# EAGLE board Sensor_board (EAGLE 7.7.0)
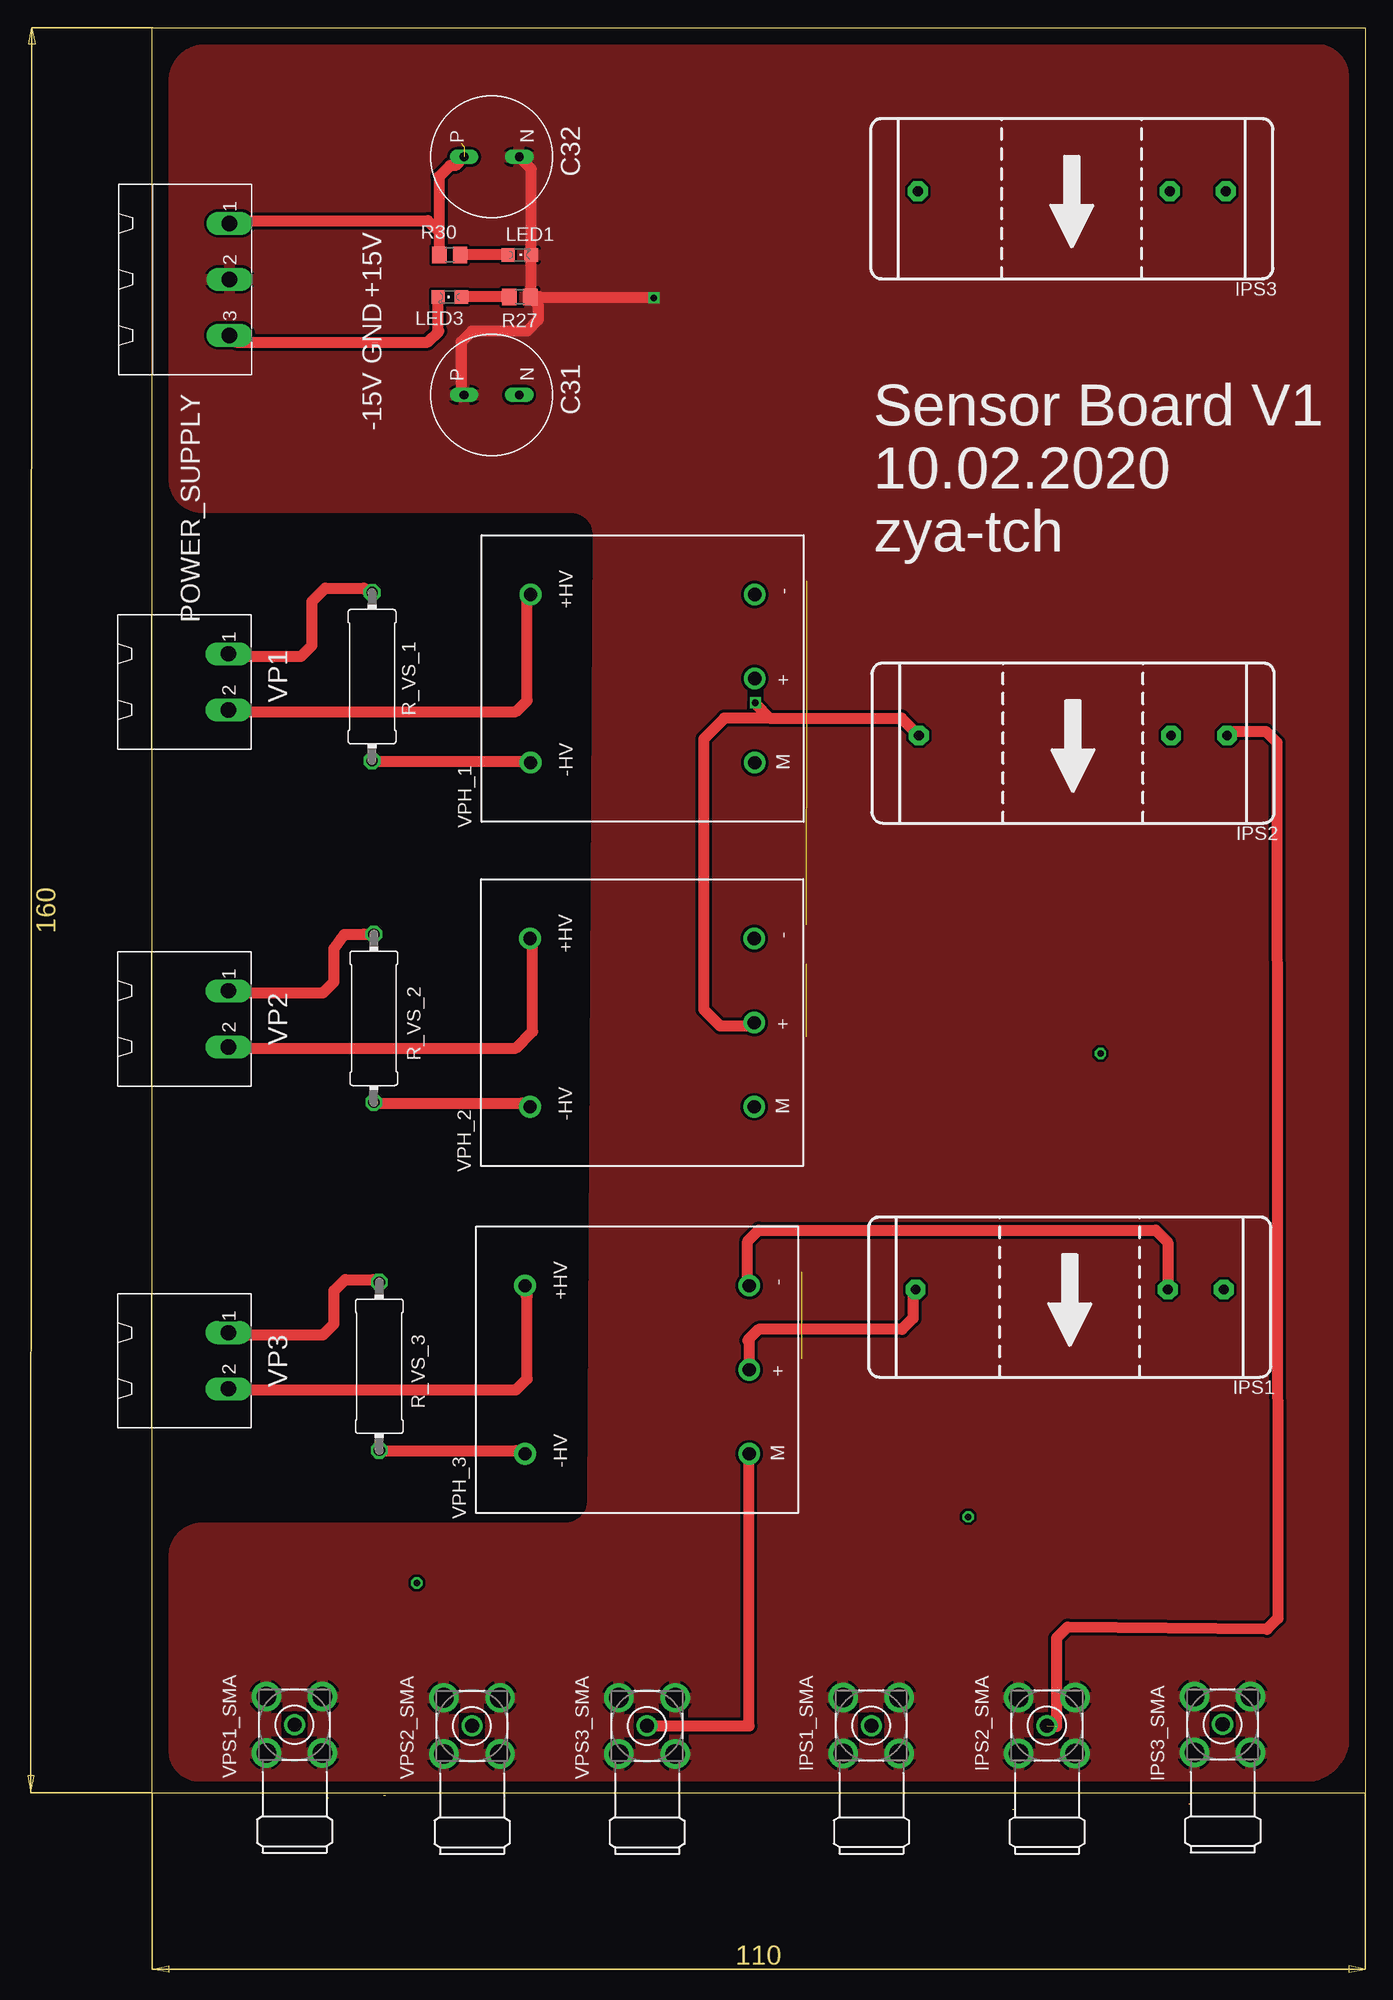
[diagram p0: board, top side]
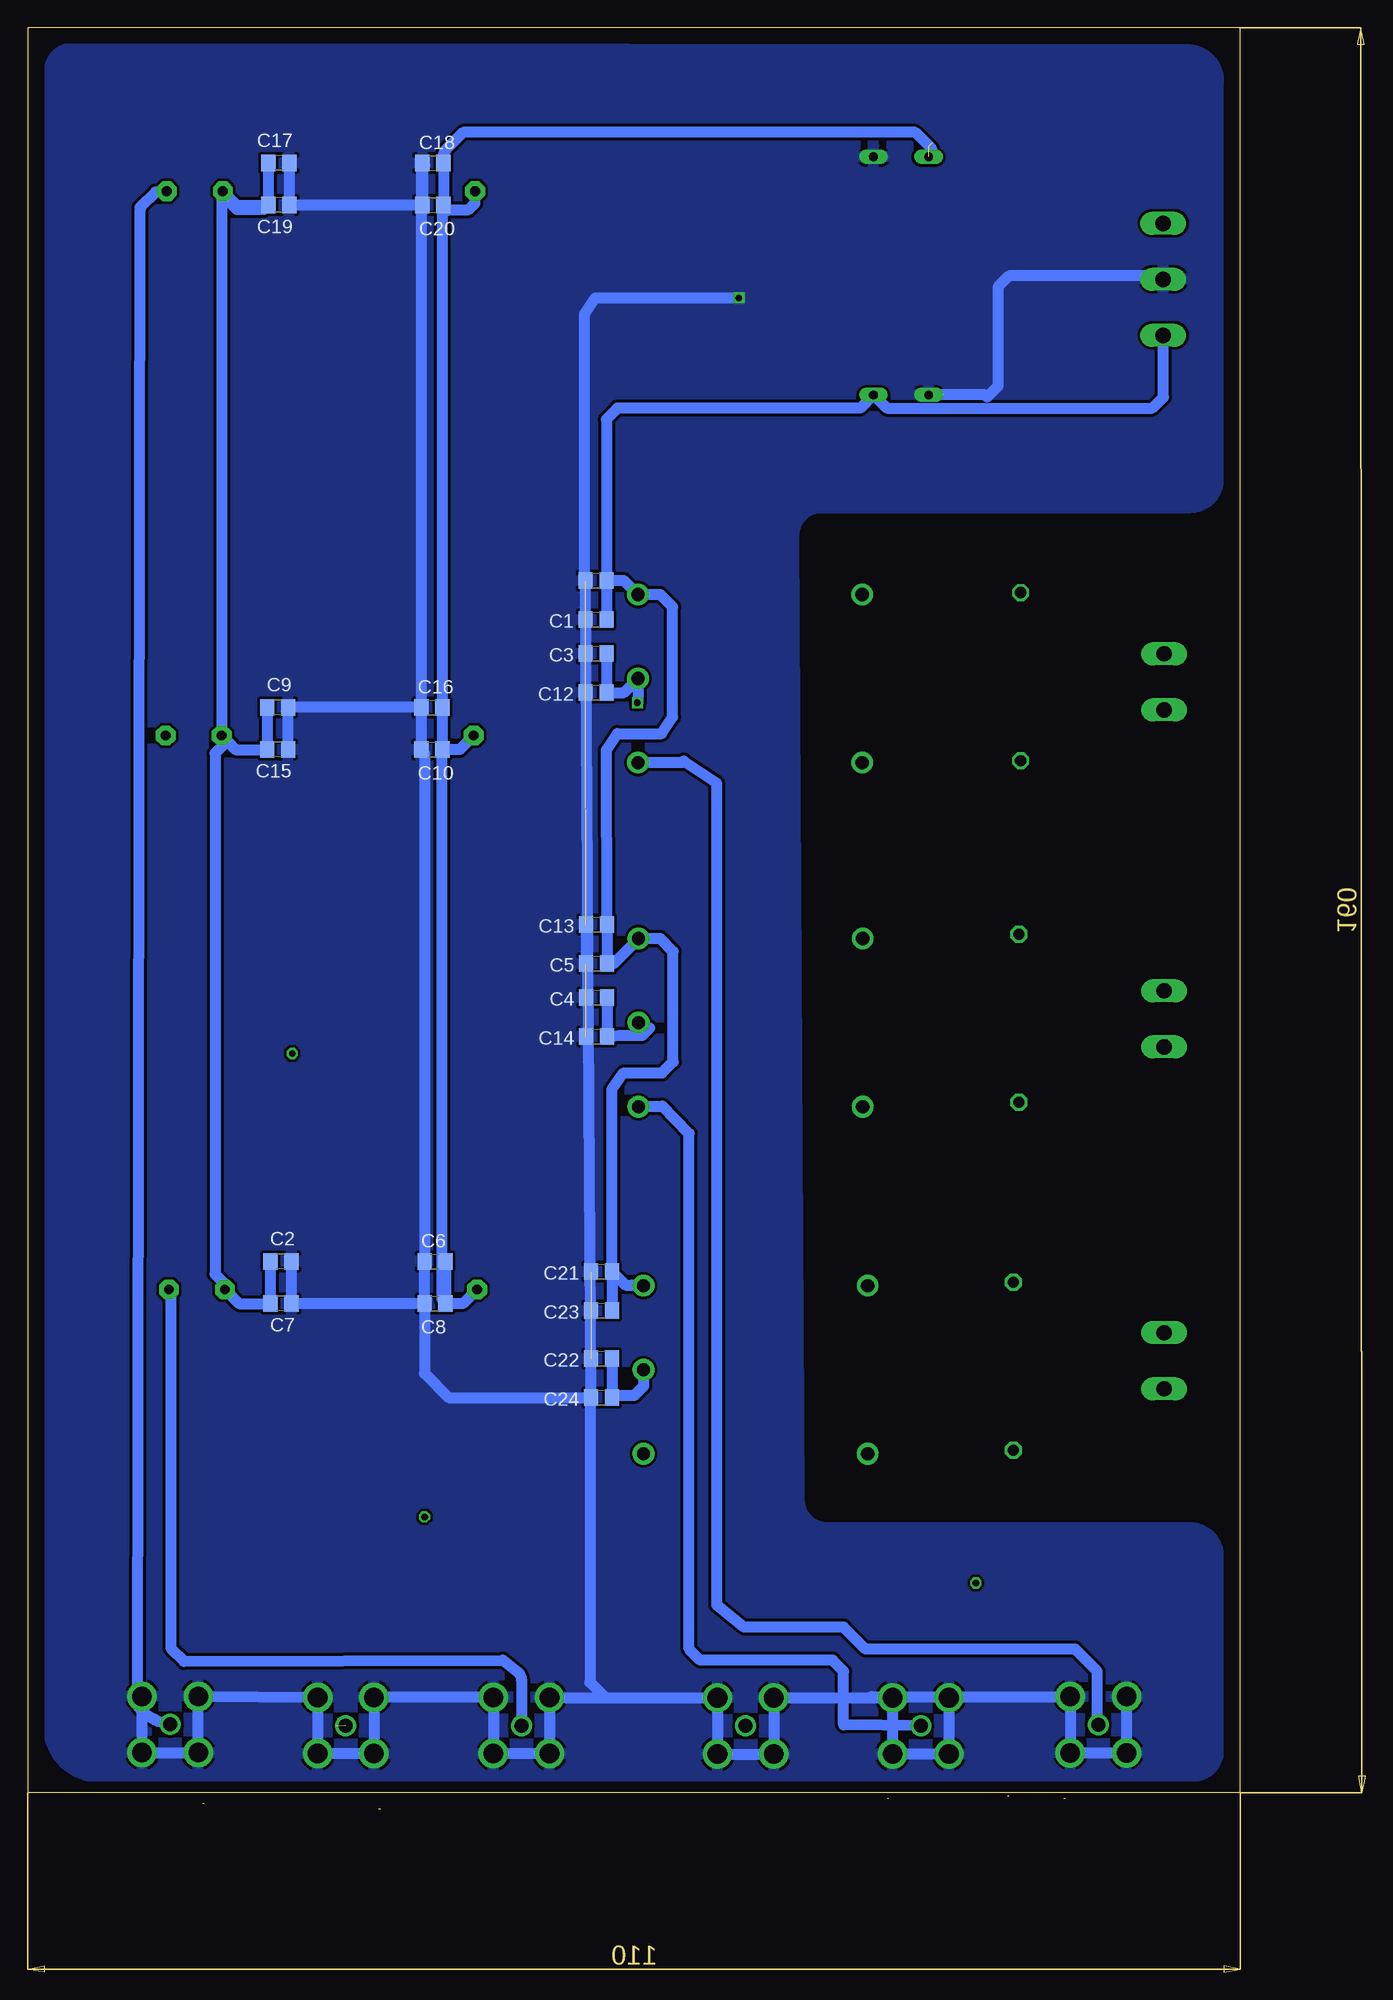
[diagram p1: board, bottom side, seen from below]

Size 110 x 161.5 mm. Coordinates in mm from the lower left corner, seen from the top.
Outline: 21.15,1.2 21,1.2
Outline: 16,1 15.9,1
Outline: 32,1 31.95,1
Outline: 94,0.5 94.1,0.5
Outline: 78,0 78.15,0
Outline: 0,1.5 110,1.5 110,161.5 0,161.5 0,1.5
Copper layers (1*16): Top 0.035mm / dielectric 1.5mm / Bottom 0.035mm
Design rules "default": minimum track width 10mil, minimum drill 24mil, track to track 8mil, track to pad 8mil, pad to pad 8mil, via to via 8mil, smd to smd 8mil, copper to edge 40mil, drill to drill 8mil, minimum pad ring 10mil, minimum via ring 8mil, stop-mask expansion 4mil, vias tented up to drill 0mil, thermal gap 10mil

## Footprints (pad centres in the part's own frame; a part is rotated, then mirrored left to right if it is on the bottom)
C0805 = smd 1.3 x 1.5: 1 -0.95,0; 2 0.95,0
ELEK_C_470UF_PAN = drill 0.8 long: + 0,2.5; - 0,-2.5
LA25P = drill 0.9 pad 1.8 octagon: M -13.97,0; V+ 13.97,0; V- -8.89,0
BU-SMA-H = drill 1.27: 1 0,0 | drill 1.778: 2 -2.55,2.55; 3 2.55,2.55; 4 2.55,-2.55; 5 -2.55,-2.55
CHIPLED_0805 = smd 1.2 x 1.2: A 0,-1.05; C 0,1.05
MSTBA3 = drill 1.397 long: 1 -5.08,5.08; 2 0,5.08; 3 5.08,5.08
R0805 = smd 1.3 x 1.5: 1 -0.95,0; 2 0.95,0
0414/15 = drill 1.016 octagon: 1 -7.62,0; 2 7.62,0
MSTBA2 = drill 1.397 long: 1 -2.54,5.08; 2 2.54,5.08
XDCR_LV25-P = drill 1.2 pad 1.962: 1 -7.62,10.16; 2 7.62,10.16; 3 -7.62,-10.16; 4 0,-10.16; 5 7.62,-10.16

## Placement (x,y rotation side)
C1  1u  [C0805]  58.45,107.84 0 bottom
C2  1u  [C0805]  87.02,49.65 180 bottom
C3  1u  [C0805]  58.45,104.76 0 bottom
C4  1u  [C0805]  58.4,73.57 0 bottom
C5  1u  [C0805]  58.4,76.65 0 bottom
C6  1u  [C0805]  73.05,49.65 0 bottom
C7  100n  [C0805]  87.02,45.84 180 bottom
C8  100n  [C0805]  73.05,45.84 0 bottom
C9  1u  [C0805]  87.32,99.87 180 bottom
C10  1u  [C0805]  73.35,96.06 0 bottom
C11  100n  [C0805]  58.45,111.38 0 bottom
C12  100n  [C0805]  58.45,101.22 0 bottom
C13  100n  [C0805]  58.4,80.19 0 bottom
C14  100n  [C0805]  58.4,70.03 0 bottom
C15  100n  [C0805]  87.32,96.06 180 bottom
C16  100n  [C0805]  73.35,99.87 0 bottom
C17  1u  [C0805]  87.21,149.22 180 bottom
C18  1u  [C0805]  73.24,149.22 0 bottom
C19  100n  [C0805]  87.21,145.41 180 bottom
C20  100n  [C0805]  73.24,145.41 0 bottom
C21  1u  [C0805]  57.95,48.73 0 bottom
C22  1u  [C0805]  57.95,40.84 0 bottom
C23  100n  [C0805]  57.95,45.19 0 bottom
C24  100n  [C0805]  57.95,37.3 0 bottom
C31  ELE_C_470UF_PAN  [ELEK_C_470UF_PAN]  30.79,128.2 90 top
C32  ELE_C_470UF_PAN  [ELEK_C_470UF_PAN]  30.79,149.79 90 top
IPS1  LA-25-P  [LA25P]  83.21,47.11 180 top
IPS1_SMA  BU-SMA-H  [BU-SMA-H]  65.21,7.58 270 top
IPS2  LA-25-P  [LA25P]  83.51,97.33 180 top
IPS2_SMA  BU-SMA-H  [BU-SMA-H]  81.14,7.58 270 top
IPS3  LA-25-P  [LA25P]  83.4,146.68 180 top
IPS3_SMA  BU-SMA-H  [BU-SMA-H]  97.07,7.68 270 top
LED1  [CHIPLED_0805]  33.33,140.9 270 top
LED3  [CHIPLED_0805]  26.98,137.09 90 top
POWER_SUPPLY  MSTBA3  [MSTBA3]  1.93,138.68 270 top
R27  2k  [R0805]  33.33,137.09 0 top
R30  2k  [R0805]  26.98,140.9 180 top
R_VS_1  21.1k  [0414/15]  19.94,102.67 270 top
R_VS_2  21.1k  [0414/15]  20.1,71.7 270 top
R_VS_3  21.1k  [0414/15]  20.6,40.15 270 top
VP1  MSTBA2  [MSTBA2]  1.85,102.2 270 top
VP2  MSTBA2  [MSTBA2]  1.85,71.65 270 top
VP3  MSTBA2  [MSTBA2]  1.85,40.65 270 top
VPH_1  LV_25-P  [XDCR_LV25-P]  44.48,102.49 90 top
VPH_2  LV_25-P  [XDCR_LV25-P]  44.43,71.3 90 top
VPH_3  LV_25-P  [XDCR_LV25-P]  43.98,39.84 90 top
VPS1_SMA  BU-SMA-H  [BU-SMA-H]  12.9,7.65 270 top
VPS2_SMA  BU-SMA-H  [BU-SMA-H]  29,7.55 270 top
VPS3_SMA  BU-SMA-H  [BU-SMA-H]  44.88,7.55 270 top

## Library data of the parts
C1-C24 R27 R30 R_VS_1-R_VS_3 = rcl
C31 C32 = Submodule
IPS1-IPS3 = lem
IPS1_SMA IPS2_SMA IPS3_SMA VPS1_SMA VPS2_SMA VPS3_SMA = con-coax; OC_FARNELL: unknown; OC_NEWARK: unknown
LED1 LED3 = led
POWER_SUPPLY = con-phoenix-508; MF: FARNELL; MPN: 1757255; OC_FARNELL: 3705183; OC_NEWARK: 71C4162
VP1-VP3 = con-phoenix-508; MF: FARNELL; MPN: 1757242; OC_FARNELL: 3705171; OC_NEWARK: 71C4161
VPH_1-VPH_3 = LV_25-P; DESCRIPTION: Current transformer [LEM] LV 25-P Current transformer; DIGI-KEY_PART_NUMBER: 398-1019-ND; DIGI-KEY_PURCHASE_URL: https://www.digikey.com/product-detail/en/lem-usa-inc/LV-25-P/398-1019-ND/409832?utm_source=snapeda&utm_medium=aggregator&utm_campaign=symbol; MF: LEM USA; MP: LV 25-P; PACKAGE: TSSOP-14 LEM

## Nets
+15V_TMA: C3.2 C4.2 C6.2 C8.2 C10.2 C12.2 C14.2 C16.2 C18.2 C20.2 C22.2 C24.2 C32.+ IPS1.V+ IPS2.V+ IPS3.V+ POWER_SUPPLY.1 R30.2 VPH_1.4 VPH_2.4 VPH_3.4
-15V_TMA: C1.2 C2.2 C5.2 C7.2 C9.2 C11.2 C13.2 C15.2 C17.2 C19.2 C21.2 C23.2 C31.- IPS1.V- IPS2.V- IPS3.V- LED3.C POWER_SUPPLY.3 VPH_1.5 VPH_2.5 VPH_3.5
GND_DIG: C1.1 C2.1 C3.1 C4.1 C5.1 C6.1 C7.1 C8.1 C9.1 C10.1 C11.1 C12.1 C13.1 C14.1 C15.1 C16.1 C17.1 C18.1 C19.1 C20.1 C21.1 C22.1 C23.1 C24.1 C31.+ C32.- IPS1_SMA.2 IPS1_SMA.3 IPS1_SMA.4 IPS1_SMA.5 IPS2_SMA.2 IPS2_SMA.3 IPS2_SMA.4 IPS2_SMA.5 IPS3_SMA.2 IPS3_SMA.3 IPS3_SMA.4 IPS3_SMA.5 LED1.C POWER_SUPPLY.2 R27.2 VPS1_SMA.2 VPS1_SMA.3 VPS1_SMA.4 VPS1_SMA.5 VPS2_SMA.2 VPS2_SMA.3 VPS2_SMA.4 VPS2_SMA.5 VPS3_SMA.2 VPS3_SMA.3 VPS3_SMA.4 VPS3_SMA.5
IPS1: IPS1.M IPS1_SMA.1
IPS2: IPS2.M IPS2_SMA.1
IPS3: IPS3.M IPS3_SMA.1
N$1: R_VS_1.2 VPH_1.1
N$2: R_VS_2.2 VPH_2.1
N$3: LED1.A R30.1
N$4: R_VS_3.2 VPH_3.1
N$12: LED3.A R27.1
VPA1: R_VS_1.1 VP1.1
VPA2: VP1.2 VPH_1.2
VPB1: R_VS_2.1 VP2.1
VPB2: VP2.2 VPH_2.2
VPC1: R_VS_3.1 VP3.1
VPC2: VP3.2 VPH_3.2
VPS1: VPH_1.3 VPS1_SMA.1
VPS2: VPH_2.3 VPS2_SMA.1
VPS3: VPH_3.3 VPS3_SMA.1

## Tracks (layer width: path | path; a pad name or v marks a point on that pad's centre or on a via)
+15V_TMA  (via drill 0.6)  (2 unrouted)
  Top 1.016: 26.03,143 26.03,147.97 26,148 27,149 27.5,149 C32.+ | 26.03,143 R30.2 | POWER_SUPPLY.1 7.25,144 25,144 26,143 26.03,143 | IPS1.V+ 69,46.87 69,44.5 68,43.5 55,43.5 54,42.5 54.14,42.36 VPH_3.4 | v54.7,100.3 54.7,100.2 56,98.9 | 56,98.9 67.97,98.9 IPS2.V+ | 56,98.9 51.9,98.9 50,97 50,72.5 51.5,71 54.29,71 VPH_2.4
  Bottom 1.016: C6.2 C8.2 | C10.2 C16.2 72.4,144.48 71.88,145 | C4.2 C14.2 56.33,70.15 54.25,70.15 53.59,70.81 VPH_2.4 | C22.2 C24.2 56.8,37.5 55,37.5 54.14,38.36 VPH_3.4 | C3.2 C12.2 55.91,101.22 VPH_1.4 54.64,100.36 v54.7,100.3 | 71.88,145 C20.2 C18.2 72.29,149.81 arc45 72,150.5 70.5,152 29.5,152 28,150.5 28,150.08 C32.+ | 71.88,145 70,145 69.43,145.57 IPS3.V+ | IPS2.V+ 70.81,96.06 C10.2 | C8.2 72.4,46.14 C10.2 | IPS1.V+ 70.51,45.84 C8.2
-15V_TMA  (via drill 0.6)
  Top 1.016: POWER_SUPPLY.3 7.61,133 25,133 26,134 25.93,134.07 LED3.C | v54,47.5 54,51.5 55,52.5 91,52.5 92.1,51.4 IPS1.V-
  Bottom 0.406: 57,48.5 56.8,48.5 55.9,47.6 55.3,47.6 55.2,47.5 54.18,47.5 VPH_3.5
  Bottom 1.016: C11.2 C1.2 | C2.2 C7.2 90.83,45.84 IPS1.V- 92.1,47.6 93,48.5 93,95.7 92,96.7 91.77,96.7 | C19.2 C17.2 | C21.2 57,48.5 C23.2 | C11.2 57.5,126 56.5,127 34.49,127 C31.- 32.09,127 8,127 7,128 7.01,128.01 POWER_SUPPLY.3 | C11.2 55.91,111.38 VPH_1.5 52.61,110.11 51.5,109 51.5,99 52.5,97.5 56.5,97.5 57.5,96 C13.2 C5.2 56.86,76.65 VPH_2.5 52.62,78.92 51.45,77.75 51.45,67.75 52.45,66.75 55.95,66.75 57,65.25 C21.2 | 91.77,96.7 IPS2.V- 92.4,146.6 92,147 92,146 91,145 88.56,145 C19.2 | IPS3.V- 91.02,145.41 C19.2 | C9.2 C15.2 91.13,96.06 91.77,96.7 | C21.2 55.77,47.5 55.2,47.5 v54,47.5
GND_DIG  (via drill 0.6)  (8 unrouted)
  Top 1.016: v45.5,137 35.3,137 35.21,137.09 R27.2 | R27.2 34.38,137.19 LED1.C 34.38,148.7 C32.- | R27.2 35,136.37 35,135 34,134 29,134 28,133 28,128 28.2,128.2 C31.+
  Bottom 1.016: C24.1 C22.1 | C2.1 C7.1 C8.1 | C17.1 C19.1 C20.1 74.19,148.78 | C8.1 C6.1 74,95.76 C10.1 C16.1 | C13.1 C5.1 | C16.1 C9.1 C15.1 | C24.1 59,37.3 59,11.5 57.6,10.1 VPS3_SMA.2 | VPS3_SMA.2 VPS3_SMA.3 VPS3_SMA.4 VPS3_SMA.5 VPS2_SMA.2 VPS2_SMA.3 VPS2_SMA.4 VPS2_SMA.5 33.45,10.2 VPS1_SMA.2 VPS1_SMA.3 VPS1_SMA.4 VPS1_SMA.5 | VPS3_SMA.2 61.13,10.1 IPS1_SMA.5 IPS1_SMA.4 IPS1_SMA.3 IPS1_SMA.2 IPS2_SMA.5 IPS2_SMA.4 IPS2_SMA.3 IPS2_SMA.2 IPS3_SMA.5 IPS3_SMA.4 IPS3_SMA.3 IPS3_SMA.2 | v45.5,137 58.5,137 59.5,135.5 59.5,111.48 C11.1 C24.1 | POWER_SUPPLY.2 7.33,139 21,139 22,138 22,129 23,128 23.2,128.2 C31.+ | C18.1 73.97,149 74.19,148.78 | C8.1 74,39.5 71.8,37.3 C24.1 | 74.19,148.78 74.3,148.67 C16.1
  pour Bottom (isolate 0.254): 108,157.46 108,6.52 arc-90 102.48,3 4.56,3 arc-90 2,5.06 2,22.96 arc-90 4.54,25.5 37.46,25.5 arc90 40,28.04 40.5,115.46 arc90 37.96,118 4.54,118 arc-90 2,120.54 2,156.5 arc-90 4.64,159.5 106.16,159.6 arc-90
  pour Top (isolate 0.254): 108,156.66 108,5.72 arc-90 103.48,3 4.56,3 arc-90 2,5.06 2,22.96 arc-90 4.54,25.5 37.46,25.5 arc90 40,28.04 40.5,115.46 arc90 37.96,118 4.54,118 arc-90 2,120.54 2,156.5 arc-90 4.64,159.5 105.96,159.5 arc-90
IPS1
  Bottom 1.016: IPS1.M arc45 97,46.67 97,14.6 95.8,13.4 66.9,13.5 65.5,12.4 arc45 65.21,11.7 IPS1_SMA.1
IPS2  (1 unrouted)
  Top 1.016: IPS2.M arc-45 98.37,97.7 101,97.7 102,96.7 102.1,17.3 101.1,16.3 83,16.5 82,15.5 82,7.5
IPS3
  Bottom 1.016: IPS3_SMA.1 arc45 100,9.34 99.8,144.9 99.8,145.2 98.4,146.6 97.44,146.6 IPS3.M
N$1
  Top 1.016: R_VS_1.2 19.99,95 34,95 34.13,94.87 VPH_1.1
N$2
  Top 1.016: R_VS_2.2 20.18,64 33.5,64 33.82,63.68 VPH_2.1
N$3
  Top 1.016: LED1.A R30.1
N$4
  Top 1.016: R_VS_3.2 20.63,32.5 33,32.5 33.28,32.22 VPH_3.1
N$8  (via drill 0.6)
  other vias: 86,68.5
N$10  (via drill 0.6)
  other vias: 74,26.5
N$12
  Top 1.016: R27.1 LED3.A
N$15  (via drill 0.6)
  other vias: 24,20.5
VPA1
  Top 1.016: VP1.1 7.17,104.5 13.5,104.5 14.5,105.5 14.5,109.5 15.7,110.7 19.2,110.7 19.61,110.29 R_VS_1.1
VPA2
  Top 1.016: VP1.2 7.09,99.5 33,99.5 34,100.5 34,109.5 34.32,109.82 VPH_1.2
VPB1
  Top 1.016: VP2.1 7.12,74 15.5,74 16.5,75 16.5,78 17.45,79.3 18.95,79.3 19.18,79.32 R_VS_2.1
VPB2
  Top 1.016: VP2.2 7.04,69 33,69 34.5,70.5 34.5,78.5 34.27,78.73 VPH_2.2
VPC1
  Top 1.016: VP3.1 7.12,43 15.5,43 16.5,44 16.5,47 17.5,48 20,48 20.23,47.77 R_VS_3.1
VPC2
  Top 1.016: VP3.2 7.04,38 33,38 34,39 34,46.5 33.82,46.68 VPH_3.2
VPS1
  Bottom 1.016: VPS1_SMA.1 13,7.8 13,12.5 15,14.5 34,14.5 36,16.5 45.01,16.5 47.5,18.5 47.5,93 50.5,95 50.63,94.87 VPH_1.3
VPS2
  Bottom 1.016: VPS2_SMA.1 36,7.65 36,12.5 37,13.5 49,13.5 50,14.5 50,61.25 52.45,63.75 52.52,63.68 VPH_2.3
VPS3
  Top 1.016: VPS3_SMA.1 54.14,7.55 VPH_3.3

## Text on the board
tNames: C32 | +15V | GND | C31 | -15V | Sensor Board V1 / 10.02.2020 / zya-tch